# EAGLE board mini_board0 (EAGLE 6.4)
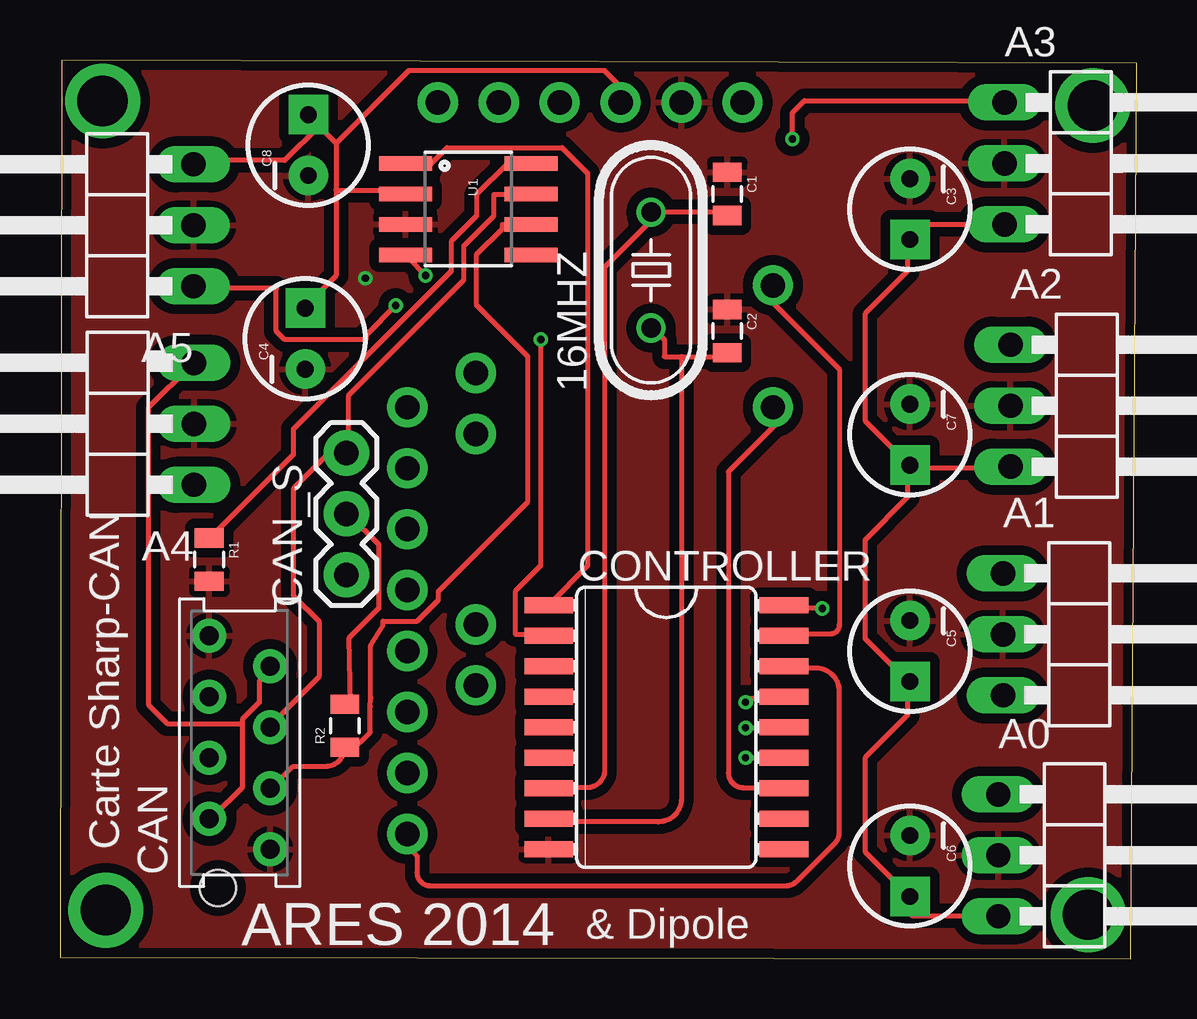
[diagram p0: board, top side]
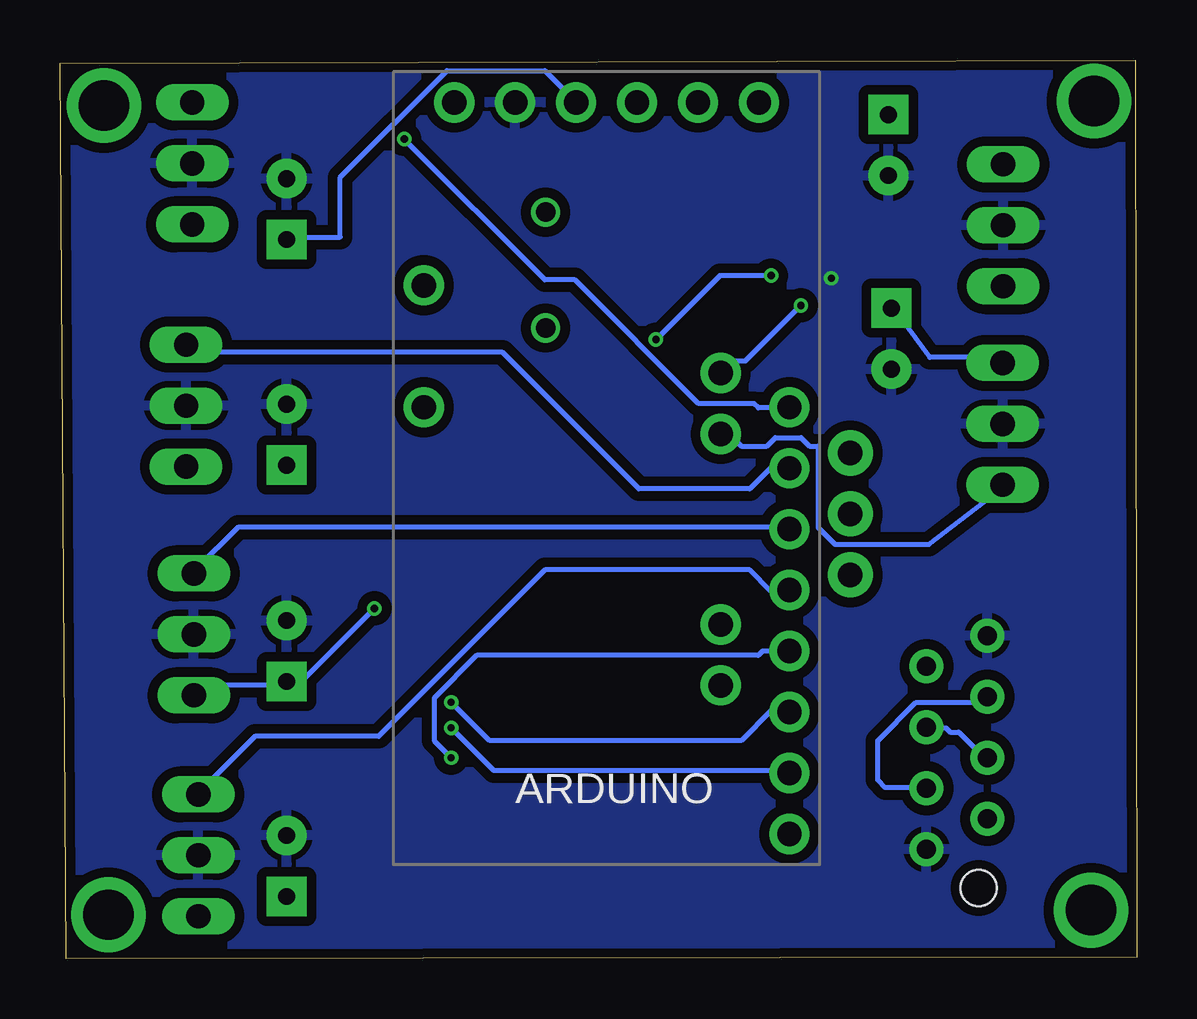
[diagram p1: board, bottom side, seen from below]

Size 44.88 x 37.45 mm. Coordinates in mm from the lower left corner, seen from the top.
Outline: 0,0.06 44.63,0 44.88,37.33 0.06,37.45 0,0.06
Copper layers (1*16): Top 0.035mm / dielectric 1.6mm / Bottom 0.035mm
Design rules "dipole *": minimum track width 0.2mm, minimum drill 0.3mm, track to track 0.15mm, track to pad 0.15mm, pad to pad 0.15mm, via to via 0.15mm, smd to smd 0.01mm, copper to edge 0.01mm, drill to drill 0.01mm, minimum pad ring 0.15mm, minimum via ring 0.15mm, stop-mask expansion 1mil, vias tented up to drill 0mil, thermal gap 10mil
Net classes: 0 default: clearance 0.205 mm

## Footprints (pad centres in the part's own frame; a part is rotated, then mirrored left to right if it is on the bottom)
HC49/S = drill 0.813: 1 -2.413,0; 2 2.413,0
1X03/90 = drill 1.016 long: 1 -2.54,-3.81; 2 0,-3.81; 3 2.54,-3.81
ARDUINO_PRO_MINI = drill 1.016 pad 1.676: 3 -7.62,7.62; 5 -7.62,2.54; 13 7.62,-15.24; 14 7.62,-12.7; 15 7.62,-10.16; 16 7.62,-7.62; 17 7.62,-5.08; 18 7.62,-2.54; 19 7.62,0; 20 7.62,2.54; A4 4.763,1.429; A5 4.763,3.969; A6 4.763,-9.049; A7 4.763,-6.509; BLK -6.35,15.24; GND -3.81,15.24; GRN 6.35,15.24; RXI 1.27,15.24; TXO 3.81,15.24; VCC -1.27,15.24
0805 = smd 0.8 x 1.2: 1 -0.9,0; 2 0.9,0
CPOL-RADIAL-10UF-25V = drill 0.7 pad 1.651 square: 1 1.27,0 | drill 0.7 pad 1.651: 2 -1.27,0
AMP-215079-8 = drill 0.8 pad 1.422: 1 0,-1.27; 2 1.27,1.27; 3 2.54,-1.27; 4 3.81,1.27; 5 5.08,-1.27; 6 6.35,1.27; 7 7.62,-1.27; 8 8.89,1.27 | hole 1.5: -1.62,0.905
1X03 = drill 1.016 pad 1.88: 1 0,0; 2 2.54,0; 3 5.08,0
SO18L = smd 0.66 x 2.032: 1 -5.08,-4.902; 2 -3.81,-4.902; 3 -2.54,-4.902; 4 -1.27,-4.902; 5 0,-4.902; 6 1.27,-4.902; 7 2.54,-4.902; 8 3.81,-4.902; 9 5.08,-4.902; 10 5.08,4.902; 11 3.81,4.902; 12 2.54,4.902; 13 1.27,4.902; 14 0,4.902; 15 -1.27,4.902; 16 -2.54,4.902; 17 -3.81,4.902; 18 -5.08,4.902
SO08 = smd 0.61 x 2.21: 1 -1.905,-2.616; 2 -0.635,-2.616; 3 0.635,-2.616; 4 1.905,-2.616; 5 1.905,2.616; 6 0.635,2.616; 7 -0.635,2.616; 8 -1.905,2.616

## Placement (x,y rotation side)
16MHZ  16MHz  [HC49/S]  24.64,28.7 90 top
A0  [1X03/90]  42.93,4.32 270 top
A1  [1X03/90]  43.12,13.53 270 top
A2  [1X03/90]  43.43,23.05 270 top
A3  [1X03/90]  43.18,33.15 270 top
A4  [1X03/90]  1.78,22.3 90 top
A5  [1X03/90]  1.76,30.57 90 top
ARDUINO  ARDUINO_PRO_MINI  [ARDUINO_PRO_MINI]  22.1,20.45 0 bottom
C1  22pF  [0805]  27.81,31.88 270 top
C2  22pF  [0805]  27.81,26.16 270 top
C3  [CPOL-RADIAL-10UF-25V]  35.43,31.24 270 top
C4  [CPOL-RADIAL-10UF-25V]  10.22,25.84 90 top
C5  [CPOL-RADIAL-10UF-25V]  35.43,12.83 270 top
C6  [CPOL-RADIAL-10UF-25V]  35.43,3.87 270 top
C7  [CPOL-RADIAL-10UF-25V]  35.43,21.84 270 top
C8  [CPOL-RADIAL-10UF-25V]  10.35,33.91 90 top
CAN  [AMP-215079-8]  7.49,4.57 90 top
CAN_S  JUMPER-3PTH  [1X03]  11.94,16 90 top
CONTROLLER  MCP2515SO  [SO18L]  25.27,9.65 270 top
R1  4,7k  [0805]  6.22,16.64 270 top
R2  120  [0805]  11.87,9.72 90 top
U1  MCP2551  [SO08]  17.02,31.24 270 top

## Library data of the parts
16MHZ = adafruit; OC_FARNELL: 1667008; OC_NEWARK: unknown
A0 A1-A5 = pinhead
ARDUINO = sharp_shield
C1-C8 = SparkFun-Capacitors
CAN = jt-con-micromatch
CAN_S R1 R2 = SparkFun-Passives
CONTROLLER = MCP2515_MT
U1 = SparkFun-DigitalIC

## Nets
A0: A0.1 ARDUINO.17
A1: A1.1 ARDUINO.18
A2: A2.1 ARDUINO.19
A3: A3.1 ARDUINO.20
A4: A4.1 ARDUINO.A4
A5: A5.1 ARDUINO.A5
CAN_CS: ARDUINO.13 CONTROLLER.16
CAN_INT: ARDUINO.5 CONTROLLER.12
CAN_RXD: CONTROLLER.2 U1.4
CAN_TXD: CONTROLLER.1 U1.1
CANH: CAN.4 CAN.5 CAN_S.3 U1.7
CANL: CAN.3 CAN.6 R2.1 U1.6
GND: A0.2 A1.2 A2.2 A3.2 A4.2 A5.2 ARDUINO.GND C1.1 C2.1 C3.2 C4.2 C5.2 C6.2 C7.2 C8.2 CAN.1 CAN.8 CONTROLLER.9 R1.2 U1.3
MISO: ARDUINO.15 CONTROLLER.15
MOSI: ARDUINO.14 CONTROLLER.14
N$2: 16MHZ.2 C1.2 CONTROLLER.7
N$3: 16MHZ.1 C2.2 CONTROLLER.8
N$5: R1.1 U1.8
N$7: CAN_S.2 R2.2
RST: ARDUINO.3 CONTROLLER.17
SCK: ARDUINO.16 CONTROLLER.13
VCC: A0.3 A1.3 A2.3 A3.3 A4.3 A5.3 ARDUINO.VCC C3.1 C4.1 C5.1 C6.1 C7.1 C8.1 CAN.2 CAN.7 CONTROLLER.18 U1.2

## Tracks (layer width: path | path; a pad name or v marks a point on that pad's centre or on a via)
A0
  Bottom 0.2: A0.1 39.06,6.96 36.75,9.27 31.6,9.27 24.66,16.2 16.13,16.2 15.24,15.32 14.53,15.32 ARDUINO.17
A1
  Bottom 0.2: A1.1 39.24,16.2 37.46,17.98 14.53,17.98 ARDUINO.18
A2
  Bottom 0.2: A2.1 39.6,25.45 39.42,25.27 26.44,25.27 20.75,19.58 16.13,19.58 15.24,20.47 14.53,20.47 ARDUINO.19
A3  (via drill 0.3)
  Top 0.2: v30.53,34.16 30.53,35.26 31.04,35.76 39.24,35.76 A3.1
  Bottom 0.2: v30.53,34.16 24.66,28.3 23.42,28.3 18.26,23.14 15.95,23.14 15.77,22.96 14.53,22.96 ARDUINO.20
A4
  Bottom 0.2: A4.1 5.38,19.8 8.66,17.27 12.57,17.27 13.28,17.98 13.28,21.36 13.64,21.36 13.99,21.72 15.06,21.72 15.42,21.36 16.48,21.36 17.02,21.89 17.2,21.89 ARDUINO.A4
A5  (via drill 0.3)
  Top 0.2: v13.99,27.23 12.75,25.98 12.75,25.81 9.37,25.81 9.02,26.16 9.02,27.94 5.64,27.94 A5.1
  Bottom 0.2: v13.99,27.23 16.31,24.92 16.84,24.92 17.2,24.56 ARDUINO.A5
CAN_CS
  Top 0.2: CONTROLLER.16 30.18,12.12 31.52,12.12 arc-90 32.49,11.15 32.49,5.27 arc-45 32.3,4.81 30.73,3.25 arc-45 30.25,3.05 15.44,3.05 arc-90 14.88,3.6 14.88,4.29 14.35,4.83 14.35,5.18 ARDUINO.13
CAN_INT
  Top 0.2: CONTROLLER.12 30.18,7.14 28.48,7.14 arc-90 27.86,7.75 27.86,20.29 29.82,22.25 29.82,22.96 ARDUINO.5
CAN_RXD  (via drill 0.3)
  Top 0.2: v20.04,25.81 20.04,16.38 18.97,15.32 18.97,13.54 20.22,13.54 CONTROLLER.2 | v15.24,28.47 14.53,29.18 U1.4
  Bottom 0.2: v20.04,25.81 17.37,28.47 v15.24,28.47
CAN_TXD
  Top 0.2: CONTROLLER.1 20.4,14.78 22,16.38 22,32.74 20.93,33.81 16.13,33.81 15.42,33.1 14.53,33.1 U1.1
CANH
  Top 0.2: 12.04,21.89 12.04,21.18 CAN_S.3 12.04,21.89 | 12.04,21.89 12.04,23.5 16.84,28.3 16.84,29.72 18.09,30.96 18.09,31.85 19.51,31.85 U1.7 | 12.04,21.89 9.73,19.58 9.73,15.14 10.79,14.07 10.79,11.76 8.84,9.8 CAN.5
  Bottom 0.2: CAN.4 6.35,8.38 7.42,9.45 7.77,9.45 7.95,9.63 8.66,9.63 CAN.5
CANL
  Top 0.2: CAN.3 8.84,7.14 9.73,8.03 11.07,8.03 arc89 R2.1 11.98,8.71 12.04,8.56 12.93,9.45 12.93,10.52 12.95,10.87 12.95,13.07 13.46,13.89 13.46,14.07 14.88,14.07 15.77,14.96 15.77,15.32 19.51,19.05 19.51,25.1 17.37,27.23 17.37,29.36 18.44,30.43 18.44,30.61 U1.6
  Bottom 0.2: CAN.6 6.35,10.87 6.53,10.69 9.2,10.69 10.79,9.09 10.79,7.46 10.48,7.14 8.84,7.14 CAN.3
GND  (via drill 0.3)
  other vias: 12.73,28.36
  pour Top (isolate 0.406): -1.4,36.96 46.55,37.59 46.23,-0.51 -0.76,-0.51
  pour Bottom (isolate 0.406): -2.67,36.96 -2.03,-0.51 46.16,-0.51 46.23,36.96
MISO  (via drill 0.3)
  Top 0.2: v28.57,10.69 28.57,10.87 30.18,10.87 CONTROLLER.15
  Bottom 0.2: v28.57,10.69 26.97,9.09 16.48,9.09 15.24,10.34 14.53,10.34 ARDUINO.15
MOSI  (via drill 0.3)
  Top 0.2: v28.57,9.63 30.18,9.63 CONTROLLER.14
  Bottom 0.2: v28.57,9.63 26.8,7.85 14.53,7.85 ARDUINO.14
N$1  (via drill 2.1 pad 2.18)
  other vias: 1.9,2.03
N$2
  Top 0.2: C1.2 27.69,31.14 24.66,31.14 16MHZ.2 24.49,30.96 24.49,30.61 22.71,28.83 22.71,7.88 arc-90 21.97,7.14 20.4,7.14 CONTROLLER.7
N$3
  Top 0.2: 25.91,25.1 25.2,25.1 25.2,25.81 24.66,26.34 16MHZ.1 | 25.91,25.1 27.69,25.1 C2.2 | 25.91,25.1 25.91,6.68 arc-90 24.94,5.71 20.4,5.71 CONTROLLER.8
N$4  (via drill 2.1 pad 2.18)
  other vias: 42.86,1.84
N$5
  Top 0.2: R1.1 6.35,17.63 9.73,21.01 9.73,22.07 16.31,28.65 16.31,29.9 17.37,30.96 17.37,31.85 18.62,33.1 19.51,33.1 U1.8
N$6  (via drill 2.1 pad 2.18)
  other vias: 43.05,35.56
N$7
  Top 0.2: R2.2 12.1,10.62 12.04,13.36 13.28,14.61 13.28,17.27 12.04,18.52 CAN_S.2 12.04,18.69
N$8  (via drill 2.1 pad 2.18)
  other vias: 1.78,35.75
RST
  Top 0.2: CONTROLLER.17 30.18,13.54 32.12,13.54 arc90 32.49,13.91 32.49,24.56 29.82,27.23 29.82,27.94 ARDUINO.3
SCK  (via drill 0.3)
  Top 0.2: v28.57,8.38 CONTROLLER.13
  Bottom 0.2: v28.57,8.38 29.29,9.09 29.29,10.87 27.51,12.65 15.77,12.65 15.6,12.83 ARDUINO.16
VCC  (via drill 0.3)
  Top 0.2: 7.59,9.8 7.59,9.98 8.31,10.69 8.31,11.58 8.66,11.94 8.66,12.12 CAN.7 | 7.59,9.8 7.59,7.14 6.35,5.89 CAN.2 | A0.3 39.06,1.8 35.51,1.8 35.51,2.52 C6.1 35.33,2.69 33.55,4.47 33.55,8.38 35.33,10.16 35.33,11.41 C5.1 35.33,11.58 33.55,13.36 33.55,17.45 35.33,19.23 35.33,20.47 C7.1 | 30.18,14.78 CONTROLLER.18 30.18,14.61 v31.77,14.61 | A2.3 39.6,20.47 35.51,20.47 C7.1 | A3.3 35.51,30.61 35.51,30.07 C3.1 35.33,29.9 35.33,28.65 33.55,26.87 33.55,22.43 35.33,20.65 C7.1 | 11.51,32.03 14.35,32.03 U1.2 | 11.51,33.98 11.51,32.03 | 10.79,34.7 10.44,35.05 C8.1 10.79,34.7 | 10.79,34.7 11.51,33.98 | 10.79,34.7 9.37,33.27 5.64,33.27 A5.3 | 11.51,32.03 11.51,28.47 10.26,27.23 C4.1 | 7.59,9.8 4.47,9.8 3.68,10.59 3.68,22.96 5.46,24.74 A4.3 | 11.51,33.98 14.53,37.01 22.7,37.01 23.24,36.47 23.24,35.76 ARDUINO.VCC
  Bottom 0.2: v31.77,14.61 34.8,11.58 35.33,11.58 C5.1 35.51,11.41 38.89,11.41 A1.3 | ARDUINO.VCC 23.42,35.76 24.66,37.01 28.75,37.01 33.2,32.56 33.2,30.07 35.33,30.07 C3.1 | C4.1 10.08,27.05 8.63,25.06 5.61,25.06 A4.3

## Text on the board
tNames: Carte Sharp-CAN | & Dipole | ARES 2014
200bmp: /home/showok/Documents/Projets/Ares/Robot-2013-2014/cartes/logo_ares_3.bmp